# EAGLE board Attiny_pjon_v02 (EAGLE 7.3.0)
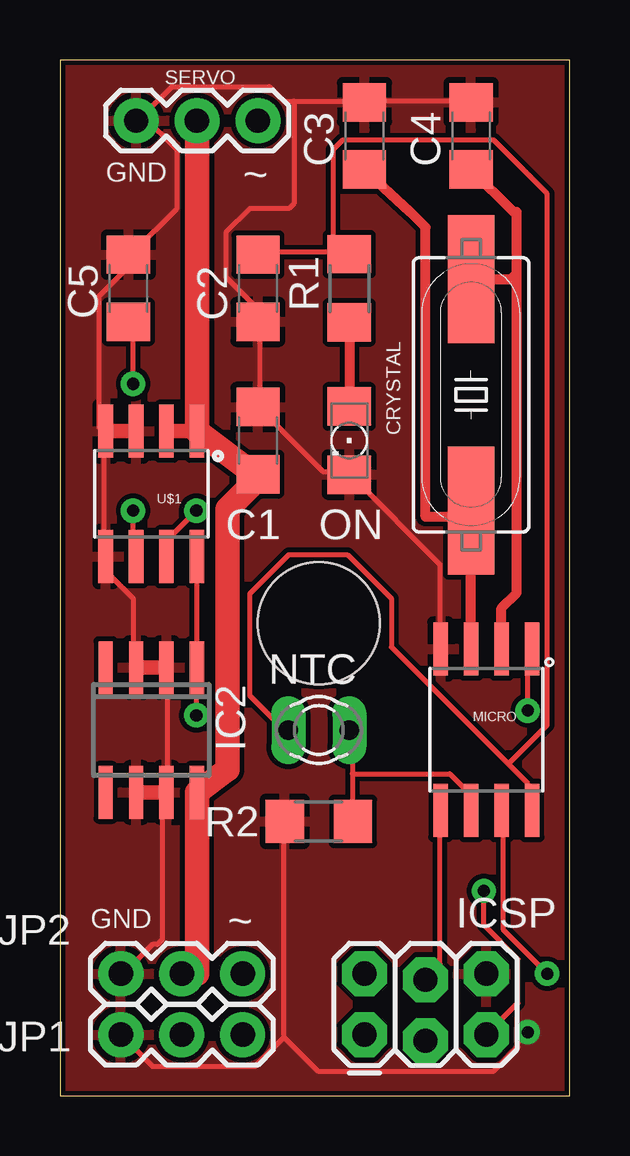
[diagram p0: board, top side]
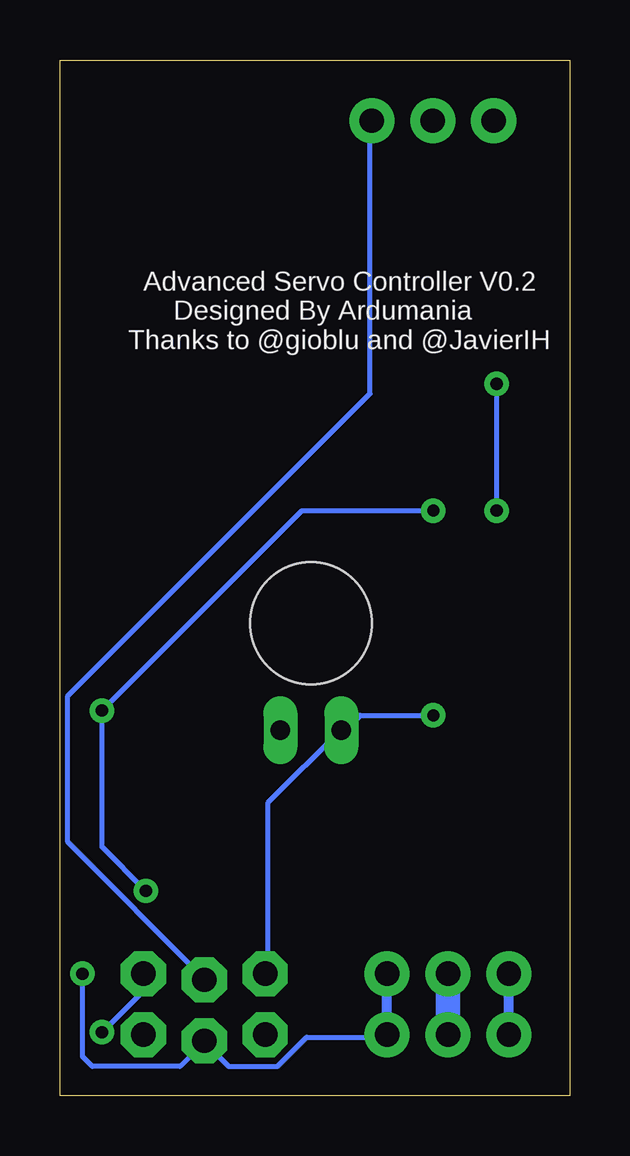
[diagram p1: board, bottom side, seen from below]

Size 21.26 x 43.17 mm. Coordinates in mm from the lower left corner, seen from the top.
Outline: 0,0 21.26,0 21.26,43.17 0,43.17 0,0
Copper layers (1*16): Top 0.035mm / dielectric 1.5mm / Bottom 0.035mm
Design rules "SparkFun": minimum track width 8mil, minimum drill 20mil, track to track 8mil, track to pad 8mil, pad to pad 8mil, via to via 8mil, smd to smd 8mil, copper to edge 8mil, drill to drill 8mil, minimum pad ring 12mil, minimum via ring 10mil, stop-mask expansion 4mil, vias tented up to drill 20mil, thermal gap 10mil
Holes 5.08 mm at 10.79,19.68

## Footprints (pad centres in the part's own frame; a part is rotated, then mirrored left to right if it is on the bottom)
C1206 = smd 1.6 x 1.8: 1 -1.4,0; 2 1.4,0
HC49UP = smd 5.334 x 1.93: 1 -4.826,0; 2 4.826,0
SO08 = smd 0.6 x 2.2: 1 -1.905,-2.6; 2 -0.635,-2.6; 3 0.635,-2.6; 4 1.905,-2.6; 5 1.905,2.6; 6 0.635,2.6; 7 -0.635,2.6; 8 -1.905,2.6
2X3_LOCK = drill 1.016 pad 1.88 octagon: 1 0,0; 2 0,2.54; 3 2.54,-0.254; 4 2.54,2.286; 5 5.08,0; 6 5.08,2.54
1X03 = drill 1.016 pad 1.88: 1 0,0; 2 2.54,0; 3 5.08,0
SO08-EIAJ = smd 0.61 x 2.21: 1 -1.905,-3.378; 2 -0.635,-3.378; 3 0.635,-3.378; 4 1.905,-3.378; 5 1.905,3.353; 6 0.635,3.353; 7 -0.635,3.353; 8 -1.905,3.353
P640 = drill 0.813 long: 1 -1.27,0; 2 1.27,0
1206 = smd 1.6 x 1.803: A -1.422,0; C 1.422,0
R1206 = smd 1.6 x 1.803: 1 -1.422,0; 2 1.422,0
SO08' = smd 0.61 x 2.21: 1 -1.905,-2.616; 2 -0.635,-2.616; 3 0.635,-2.616; 4 1.905,-2.616; 5 1.905,2.616; 6 0.635,2.616; 7 -0.635,2.616; 8 -1.905,2.616

## Placement (x,y rotation side)
C1  0.33uF  [C1206]  8.26,27.3 90 top
C2  0.1uF  [C1206]  8.26,33.66 270 top
C3  22pF  [C1206]  12.7,40.01 90 top
C4  22pF  [C1206]  17.14,40.01 90 top
C5  1nF  [C1206]  2.86,33.66 90 top
CRYSTAL  [HC49UP]  17.14,29.21 90 top
IC2  78L05SMD  [SO08]  3.81,15.24 180 top
ICSP  AVR_SPI_PRG_62X3_LOCK  [2X3_LOCK]  12.7,2.54 0 top
JP1  [1X03]  2.54,2.54 0 top
JP2  [1X03]  2.54,5.08 0 top
MICRO  Tiny85-20-SMT  [SO08-EIAJ]  17.78,15.24 180 top
NTC  10K  [P640]  10.79,15.24 180 top
ON  [1206]  12.06,27.3 270 top
R1  220  [R1206]  12.06,33.66 90 top
R2  10K  [R1206]  10.79,11.43 0 top
SERVO  [1X03]  3.17,40.64 0 top
U$1  ACS712  [SO08']  3.81,25.08 180 top

## Library data of the parts
C1-C5 = rcl
CRYSTAL = SparkFun-FreqCtrl
IC2 = linear
ICSP JP1 JP2 SERVO = SparkFun-Connectors
MICRO = SparkFun-DigitalIC; PROD_ID: IC-09092
NTC = ptc-ntc; OC_FARNELL: unknown; OC_NEWARK: unknown
ON = led
R1 R2 = resistor
U$1 = SparkFun-AnalogIC; PROD_ID: IC-08964

## Nets
ADC0: ICSP.5 MICRO.1 U$1.7
GND: C1.2 C2.2 C3.2 C4.2 C5.2 IC2.2 IC2.3 IC2.6 IC2.7 ICSP.6 JP1.1 JP2.1 MICRO.4 ON.C R2.1 SERVO.1 U$1.3 U$1.4 U$1.5
MISO: ICSP.1
MOSI: ICSP.4 MICRO.5 SERVO.3
N$2: C5.1 U$1.6
N$8: ON.A R1.1
NTC: MICRO.6 NTC.1 R2.2
PJON: ICSP.3 JP1.3 JP2.3 MICRO.7
VCC: C1.1 IC2.8 JP1.2 JP2.2 SERVO.2 U$1.1 U$1.2
VO: C2.1 IC2.1 ICSP.2 MICRO.8 NTC.2 R1.2 U$1.8
XTAL: C4.1 CRYSTAL.2 MICRO.2
XTAL2: C3.1 CRYSTAL.1 MICRO.3

## Tracks (layer width: path | path; a pad name or v marks a point on that pad's centre or on a via)
ADC0  (via drill 0.51)
  Top 0.203: v19.51,16.05 19.51,18.49 MICRO.1 | v17.68,8.53 17.68,7.11 19.1,5.69 19.1,3.86 ICSP.5 | v5.69,24.38 4.47,23.16 4.47,22.55 U$1.7
  Bottom 0.203: v17.68,8.53 19.51,10.36 v19.51,16.05 11.18,24.38 v5.69,24.38
GND  (via drill 0.51)
  Top 0.203: 9.35,2.44 9.35,11.38 R2.1 | 9.35,2.44 8.13,1.22 3.86,1.22 JP1.1 | v19.51,2.64 19.1,2.23 19.1,2.03 18.09,1.02 10.77,1.02 9.35,2.44 | MICRO.4 15.85,18.69 15.85,22.15 12.19,25.81 ON.C 11.99,26.01 10.97,26.01 8.33,28.65 C1.2 8.33,28.85 8.33,32.11 C2.2 8.13,32.31 8.13,32.92 6.91,34.14 6.91,35.97 7.92,36.98 9.55,36.98 9.75,37.19 9.75,41.45 | C4.2 17.07,41.45 12.8,41.45 C3.2 12.6,41.45 9.75,41.45 | 9.75,41.45 9.35,41.45 8.74,42.06 4.67,42.06 3.45,40.84 | 3.45,40.84 3.25,40.64 SERVO.1 3.45,40.84 | IC2.2 4.47,17.68 4.47,12.8 IC2.7 4.27,12.39 4.27,6.5 4.06,6.3 3.86,6.3 2.64,5.08 JP2.1 | IC2.3 3.05,18.09 3.05,20.73 2.03,21.74 2.03,22.35 U$1.5 1.83,22.55 1.83,27.43 U$1.4 1.63,27.84 1.63,33.33 2.85,34.54 2.85,34.95 C5.2 3.05,35.15 4.88,36.98 4.88,39.42 3.45,40.84
  Top 0.61: IC2.6 IC2.7 | IC2.3 IC2.2 | U$1.4 U$1.3
  Bottom 0.203: v19.51,2.64 17.88,4.27 17.88,5.08 ICSP.6
  Bottom 0.406: JP1.1 JP2.1
  pour Top: 0,43.18 21.27,43.18 21.27,0 0,0
MOSI
  Top 0.203: MICRO.5 15.85,11.79 15.85,5.49 15.24,4.88 ICSP.4
  Bottom 0.203: SERVO.3 8.33,40.64 8.33,29.26 20.93,16.66 20.93,10.57 15.24,4.88 ICSP.4
N$2  (via drill 0.51)
  Top 0.203: v3.05,29.67 3.05,32.11 C5.1 | v3.05,24.38 3.05,22.55 U$1.6
  Bottom 0.203: v3.05,24.38 v3.05,29.67
N$8
  Top 0.406: R1.1 ON.A
NTC
  Top 0.203: 12.19,13.41 12.19,15.24 NTC.1 | 12.19,13.41 12.19,11.58 R2.2 | 12.19,13.41 16.26,13.41 17.07,12.6 17.07,11.99 MICRO.6
PJON  (via drill 0.51)
  Top 0.203: v20.32,5.08 18.49,6.91 18.49,11.79 MICRO.7
  Bottom 0.203: v20.32,5.08 20.32,1.63 19.91,1.22 16.26,1.22 15.24,2.23 | 15.24,2.23 14.22,1.22 12.19,1.22 10.97,2.44 7.72,2.44 JP1.3 | 15.24,2.23 ICSP.3
  Bottom 0.406: JP1.3 JP2.3
VCC
  Top 0.203: 8.07,25.93 8.13,26.01 C1.1
  Top 0.406: JP2.2 5.71,5.08 | 7.94,25.4 C1.1
  Top 0.61: U$1.2 U$1.1
  Top 1.016: SERVO.2 U$1.1 8.07,25.93 8.26,25.79 | 5.71,5.08 IC2.8 6.99,13.59 6.99,24.45 7.94,25.4
  Bottom 1.016: JP1.2 JP2.2
VO  (via drill 0.51)
  Top 0.203: U$1.8 5.69,22.35 5.69,17.88 IC2.1 5.69,17.68 v5.69,15.85 | 11.38,35.15 11.99,35.15 R1.2 11.38,35.15 | 11.38,35.15 8.33,35.15 C2.1 | 18.69,13.82 13.82,18.69 13.82,20.73 11.99,22.55 9.55,22.55 7.92,20.93 7.92,16.66 9.35,15.24 NTC.2 | 18.69,13.82 19.51,13.01 19.51,11.99 MICRO.8 | 11.38,35.15 11.38,39.42 11.79,39.83 18.09,39.83 20.32,37.59 20.32,15.44 18.69,13.82
  Bottom 0.203: v5.69,15.85 8.74,15.85 9.35,15.24 NTC.2 9.55,15.24 12.6,12.19 12.6,5.08 ICSP.2
XTAL
  Top 0.406: MICRO.2 18.41,20.32 19.05,20.95 19.05,34.29 | 19.05,34.29 19.05,36.83 18.92,36.83 C4.1 | CRYSTAL.2 18.8,34.04 19.05,34.29
XTAL2
  Top 0.406: 17.14,18.41 MICRO.3 CRYSTAL.1 17.14,24.13 15.24,24.13 15.24,36.2 14.61,36.83 C3.1

## Text on the board
tNames: GND | ~ | GND | ~
bNames: Advanced Servo Controller V0.2 / Designed By Ardumania / Thanks to @gioblu and @JavierIH